# EAGLE board GPIO (EAGLE 7.1.0)
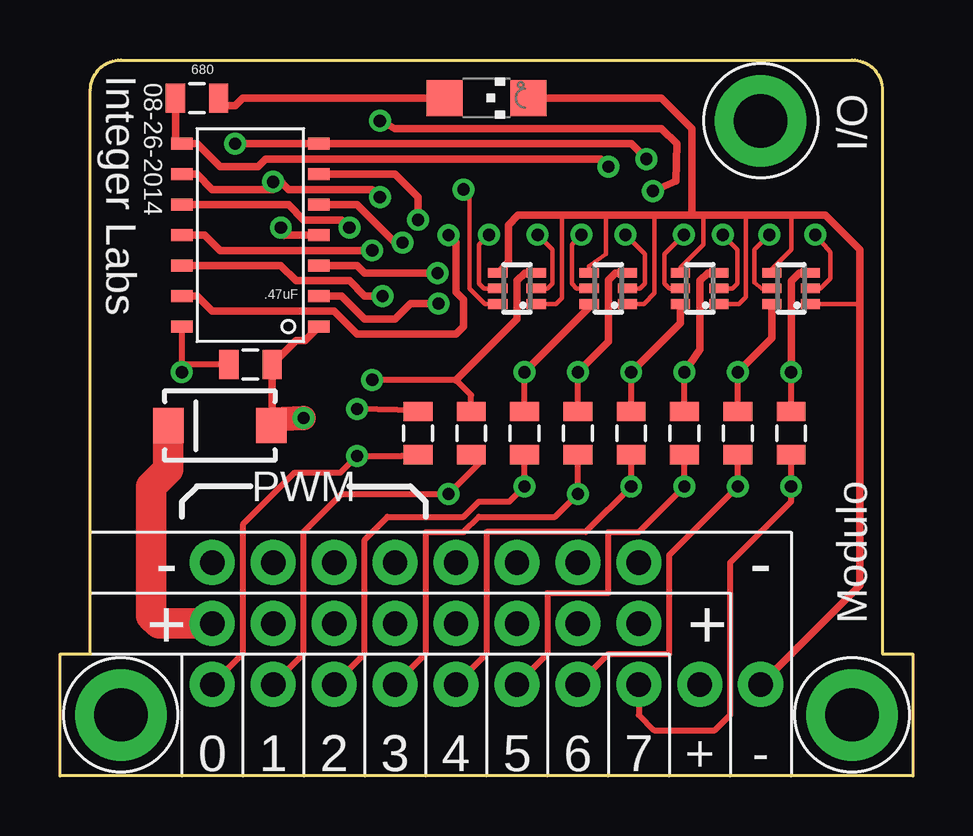
[diagram p0: board, top side]
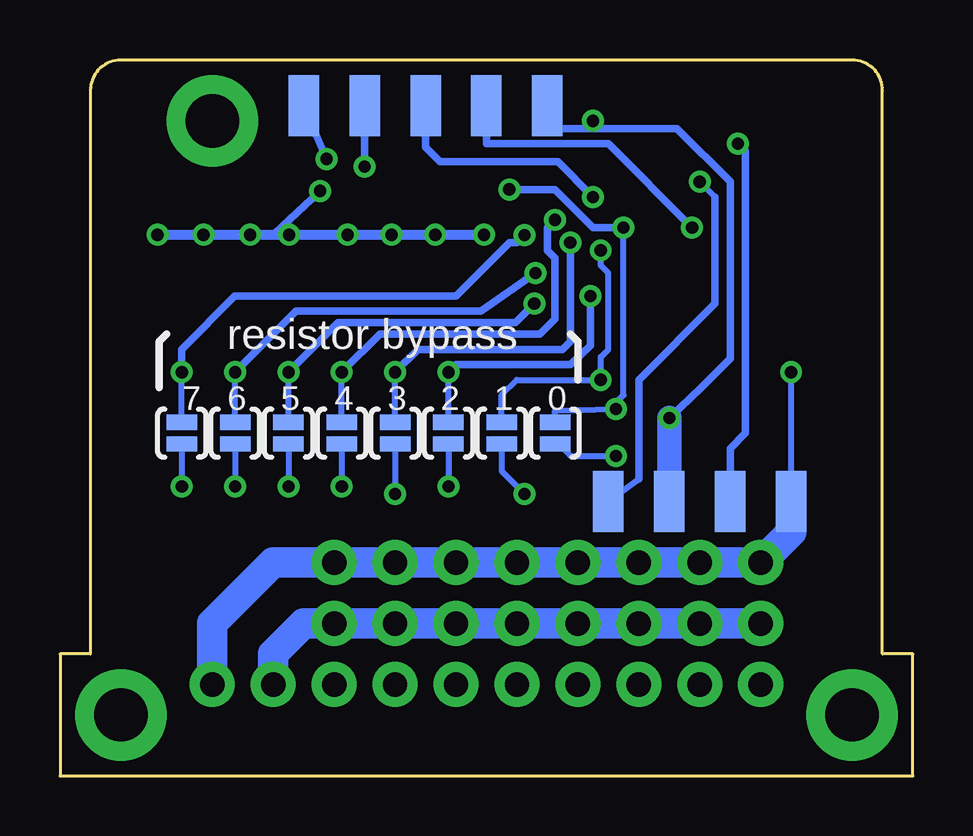
[diagram p1: board, bottom side, seen from below]

Size 35.56 x 29.84 mm. Coordinates in mm from the lower left corner, seen from the top.
Copper layers (1*16): Top 0.0178mm / dielectric 59mil / Bottom 0.0178mm
Design rules "SSC-EAGLE-2Lyr_v1.0.0.3 *": minimum track width 6mil, minimum drill 14mil, track to track 6mil, track to pad 6mil, pad to pad 6mil, via to via 6mil, smd to smd 6mil, copper to edge 20mil, drill to drill 16mil, minimum pad ring 8mil, minimum via ring 8mil, stop-mask expansion 3mil, vias tented up to drill 25mil, thermal gap 10mil

## Footprints (pad centres in the part's own frame; a part is rotated, then mirrored left to right if it is on the bottom)
0805 = smd 0.8 x 1.2: 1 -0.9,0; 2 0.9,0
SMA-DIODE = smd 1.27 x 1.47: A -2.15,0; C 2.15,0
SOT363_PHILIPS = smd 0.4 x 0.8: 1 -0.65,-0.8; 2 0,-0.8; 3 0.65,-0.8; 4 0.65,0.8; 5 0,0.8; 6 -0.65,0.8
1X08_NO_SILK = drill 1.016 pad 1.88: 1 0,0; 2 2.54,0; 3 5.08,0; 4 7.62,0; 5 10.16,0; 6 12.7,0; 7 15.24,0; 8 17.78,0
1X10_NO_SILK = drill 1.016 pad 1.88: 1 0,0; 2 2.54,0; 3 5.08,0; 4 7.62,0; 5 10.16,0; 6 12.7,0; 7 15.24,0; 8 17.78,0; 9 20.32,0; 10 22.86,0
CHIPLED_1206 = smd 1.5 x 1.5: A 0,-1.75; C 0,1.75
SJ_2S-NO = smd 0.635 x 1.27: 1 -0.45,0; 2 0.45,0
SOIC14 = smd 0.508 x 0.889: 1 0,-3.175; 2 1.27,-3.175; 3 2.54,-3.175; 4 3.81,-3.175; 5 5.08,-3.175; 6 6.35,-3.175; 7 7.62,-3.175; 8 7.62,2.54; 9 6.35,2.54; 10 5.08,2.54; 11 3.81,2.54; 12 2.54,2.54; 13 1.27,2.54; 14 0,2.54
FOOTPRINT2 = smd 1.27 x 2.54 bottom: BUS0 5.08,11.43; BUS1 7.62,11.43; BUS2 10.16,11.43; BUS3 12.7,11.43; PROG0 15.24,27.94; PROG1 17.78,27.94; PROG2 20.32,27.94; PROG3 22.86,27.94; PROG4 25.4,27.94 | drill 2.223 pad 3.81: P$1 2.54,2.54; P$2 33.02,2.54; P$3 29.21,27.305

## Placement (x,y rotation side)
C2  .47uF  [0805]  7.94,17.14 0 top
D1  DIODE-SCHOTTKY_  [SMA-DIODE]  6.67,14.61 180 top
D26  BAS70XY  [SOT363_PHILIPS]  19.05,20.32 90 top
D27  BAS70XY  [SOT363_PHILIPS]  22.86,20.32 90 top
D28  BAS70XY  [SOT363_PHILIPS]  26.67,20.32 90 top
D29  BAS70XY  [SOT363_PHILIPS]  30.48,20.32 90 top
JP1  [1X08_NO_SILK]  6.35,8.89 0 top
JP2  M10NO_SILK  [1X10_NO_SILK]  6.35,3.81 0 top
JP3  [1X08_NO_SILK]  6.35,6.35 0 top
LED  blue  [CHIPLED_1206]  17.78,28.26 270 top
R0  SOLDERJUMPERNO  [SJ_2S-NO]  23.81,14.29 270 bottom
R1  SOLDERJUMPERNO  [SJ_2S-NO]  21.59,14.29 270 bottom
R2  SOLDERJUMPERNO  [SJ_2S-NO]  14.92,14.29 270 bottom
R3  SOLDERJUMPERNO  [SJ_2S-NO]  17.14,14.29 270 bottom
R4  SOLDERJUMPERNO  [SJ_2S-NO]  28.26,14.29 270 bottom
R5  SOLDERJUMPERNO  [SJ_2S-NO]  19.37,14.29 270 bottom
R6  SOLDERJUMPERNO  [SJ_2S-NO]  26.04,14.29 270 bottom
R7  SOLDERJUMPERNO  [SJ_2S-NO]  30.48,14.29 270 bottom
R8  200  [0805]  30.48,14.29 90 top
R9  200  [0805]  28.26,14.29 90 top
R10  200  [0805]  26.04,14.29 90 top
R11  200  [0805]  23.81,14.29 90 top
R12  200  [0805]  21.59,14.29 90 top
R13  200  [0805]  19.37,14.29 90 top
R14  200  [0805]  17.14,14.29 90 top
R15  200  [0805]  14.92,14.29 90 top
RLED  680  [0805]  5.71,28.26 180 top
U$3  TINY841  [SOIC14]  7.62,18.73 90 top
U$4  FOOTPRINTFOOTPRINT-2  [FOOTPRINT2]  0,0 0 top

## Library data of the parts
C2 = SparkFun-Capacitors
D1 = SparkFun-DiscreteSemi
D26-D29 = diode
JP1-JP3 = SparkFun-Connectors
LED = led
R0 R1-R7 RLED = SparkFun-Passives
R8-R15 = SparkFun-Resistors
U$3 U$4 = IntegerLabs

## Nets
GND: C2.1 D26.1 D26.4 D27.1 D27.4 D28.1 D28.4 D29.1 D29.4 JP1.1 JP1.2 JP1.3 JP1.4 JP1.5 JP1.6 JP1.7 JP1.8 JP2.10 LED.C U$3.14 U$4.BUS0
GPIO0: D26.6 R2.1 R15.2 U$3.10
GPIO1: D26.3 R3.1 R14.2 U$3.11
GPIO2: D27.6 R5.1 R13.2 U$3.12
GPIO3: D27.3 R1.1 R12.2 U$3.5
GPIO4: D28.6 R0.1 R11.2 U$3.6
GPIO5: D28.3 R6.1 R10.2 U$3.2
GPIO6: D29.6 R4.1 R9.2 U$3.3
GPIO7: D29.3 R7.1 R8.2 U$3.13
MISO/LED: RLED.2 U$3.8 U$4.PROG3
N$5: LED.A RLED.1
P0: JP2.1 R2.2 R15.1
P1: JP2.2 R3.2 R14.1
P2: JP2.3 R5.2 R13.1
P3: JP2.4 R1.2 R12.1
P4: JP2.5 R0.2 R11.1
P5: JP2.6 R6.2 R10.1
P6: JP2.7 R4.2 R9.1
P7: JP2.8 R7.2 R8.1
RESET: U$3.4 U$4.PROG1
SCL/SCK: U$3.9 U$4.BUS3 U$4.PROG2
SDA/MOSI: U$3.7 U$4.BUS1 U$4.PROG4
VCC: C2.2 D1.A D26.2 D26.5 D27.2 D27.5 D28.2 D28.5 D29.2 D29.5 U$3.1 U$4.BUS2 U$4.PROG0
VOUT: D1.C JP2.9 JP3.1 JP3.2 JP3.3 JP3.4 JP3.5 JP3.6 JP3.7 JP3.8

## Tracks (layer width: path | path; a pad name or v marks a point on that pad's centre or on a via)
GND  (via drill 0.51)
  Top 0.191: D26.1 20.69,19.67 20.93,19.91 20.93,23.37 | D27.1 24.34,19.67 24.79,20.12 24.79,23.37 | D28.4 25.87,21.2 26.82,22.15 26.82,23.37 | D28.1 28.31,19.67 28.6,19.96 28.6,23.37 | D29.4 29.68,20.92 29.67,21.13 30.48,21.95 30.48,23.37 | D27.4 22.06,21.25 22.76,21.74 22.76,23.37 | D26.4 18.25,21.09 | D29.1 33.3,19.67 33.34,19.71
  Top 0.254: 7.04,16.77 C2.1 5.08,17.14 | U$3.14 5.08,17.14 | 5.08,17.14 v5.08,16.83
  Top 0.318: 26.35,23.37 26.82,23.37 28.6,23.37 30.48,23.37 31.9,23.37 33.34,21.93 33.34,19.71 33.34,7.94 JP2.10 | 26.35,23.37 24.79,23.37 22.76,23.37 20.93,23.37 19.1,23.37 18.69,22.96 18.69,21.41 D26.4 | LED.C 25.08,28.26 26.35,26.99 26.35,23.37
  Bottom 0.254: U$4.BUS0 v5.08,16.83
  Bottom 1.27: U$4.BUS0 5.08,10.16 JP1.1 JP1.2 JP1.3 JP1.4 JP1.5 JP1.6 JP1.7 JP1.8 26.67,8.89 29.21,6.35 JP2.10
GPIO0  (via drill 0.51)
  Top 0.191: D26.6 17.72,19.67 17.07,20.32 17.07,22.99 17.07,24.21 v16.83,24.45
  Top 0.254: R15.2 14.92,15.24 v12.38,15.29
  Top 0.318: U$3.10 9.53,23.81 10.16,23.18 11.75,23.18 v12.06,22.86
  Bottom 0.254: v12.06,22.86 12.06,15.88 12.38,15.56 v12.38,15.29 14.92,15.24 R2.1
  Bottom 0.318: v12.06,22.86 13.34,22.86 14.92,24.45 v16.83,24.45
GPIO1  (via drill 0.51)
  Top 0.254: R14.2 17.14,15.88 16.51,16.51 v13.02,16.51
  Top 0.318: U$3.11 6.03,22.54 6.67,21.91 v13.02,21.91 | D26.3 19.38,20.97 19.05,20.64 19.05,19.05 16.51,16.51
  Bottom 0.254: v13.02,21.91 13.02,21.27 12.7,20.95 12.7,17.78 13.02,17.46 v13.02,16.51 16.51,16.51 17.14,15.88 R3.1
GPIO2  (via drill 0.51)
  Top 0.254: R13.2 v19.37,16.83
  Top 0.318: U$3.12 9.21,21.27 9.84,20.64 12.06,20.64 12.7,20 v13.45,20 | 19.22,16.98 v19.37,16.83 22.06,19.52 D27.6
  Bottom 0.254: R5.1 v19.37,16.83
  Bottom 0.318: v19.37,16.83 19.05,17.14 14.29,17.14 13.45,17.93 v13.45,20
GPIO3  (via drill 0.51)
  Top 0.254: R12.2 v21.59,16.83
  Top 0.318: v14.29,22.23 13.97,22.23 12.38,23.81 U$3.5 | D27.3 23.15,20.97 22.86,20.68 22.86,18.1 v21.59,16.83
  Bottom 0.254: R1.1 v21.59,16.83
  Bottom 0.318: v21.59,16.83 20.64,17.78 14.61,17.78 14.29,18.1 v14.29,22.23
GPIO4  (via drill 0.51)
  Top 0.254: R11.2 v23.81,16.83
  Top 0.318: D28.6 25.87,18.89 v23.81,16.83 | U$3.6 13.97,25.08 14.92,24.13 v14.92,23.18
  Bottom 0.254: R0.1 v23.81,16.83
  Bottom 0.318: v23.81,16.83 22.23,18.41 15.56,18.41 14.92,19.05 14.92,21.59 15.24,21.91 15.24,22.86 v14.92,23.18
GPIO5  (via drill 0.51)
  Top 0.254: R10.2 v26.04,16.83
  Top 0.318: v15.79,19.68 14.61,19.68 13.97,19.05 12.7,19.05 11.75,20 U$3.2 | D28.3 27,20.97 26.67,20.64 26.67,17.78 v26.04,16.83
  Bottom 0.254: R6.1 v26.04,16.83
  Bottom 0.318: v26.04,16.83 23.97,18.89 16.58,18.89 v15.79,19.68
GPIO6  (via drill 0.51)
  Top 0.254: R9.2 v28.26,16.83
  Top 0.318: U$3.3 12.38,21.27 12.7,20.95 v15.73,20.95 | D29.6 29.68,18.25 v28.26,16.83
  Bottom 0.254: R4.1 v28.26,16.83
  Bottom 0.318: v28.26,16.83 25.72,19.37 18.01,19.37 v15.73,20.95
GPIO7  (via drill 0.51)
  Top 0.254: R8.2 v30.48,16.83
  Top 0.318: U$3.13 5.71,20 6.35,19.37 11.43,19.37 12.38,18.41 16.51,18.41 16.83,18.73 16.83,19.85 16.51,20.17 16.51,22.23 v16.19,22.54 | 30.48,17.14 v30.48,16.83 30.48,20.62 30.82,20.97 D29.3
  Bottom 0.254: R7.1 v30.48,16.83
  Bottom 0.318: v30.48,16.83 30.48,17.78 30.49,17.78 28.27,20 19.05,20 16.83,22.23 16.51,22.23 v16.19,22.54
MISO/LED  (via drill 0.51)
  Top 0.254: 4.82,26.62 U$3.8
  Top 0.318: U$3.8 5.71,26.35 6.67,25.4 8.26,25.4 8.57,25.72 22.54,25.72 v22.86,25.4 | RLED.2 4.82,26.62
  Bottom 0.318: U$4.PROG3 v22.86,25.4
N$5
  Top 0.254: 6.93,27.94 RLED.1
  Top 0.318: LED.A 7.62,28.26 7.3,27.94 6.93,27.94
P0  (via drill 0.51)
  Top 0.254: JP2.1 7.62,5.08 7.62,10.48 9.78,12.64 11.69,12.64 v12.38,13.34 14.24,13.34 R15.1
  Bottom 0.254: v12.38,13.34 14.29,13.34 14.79,13.84 R2.2
P1  (via drill 0.51)
  Top 0.254: JP2.2 10.16,5.08 10.16,10.16 11.75,11.75 v16.19,11.75 17.46,13.02 R14.1
  Bottom 0.254: R3.2 17.14,12.7 v16.19,11.75
P2  (via drill 0.51)
  Top 0.254: JP2.3 12.7,5.08 12.7,9.84 13.65,10.79 16.83,10.79 17.46,11.43 18.73,11.43 v19.37,12.06 R13.1
  Bottom 0.254: R5.2 v19.37,12.06
P3  (via drill 0.51)
  Top 0.254: JP2.4 15.24,5.08 15.24,10.16 16.83,10.16 17.46,10.79 20.64,10.79 v21.59,11.75 R12.1
  Bottom 0.254: R1.2 v21.59,11.75
P4  (via drill 0.51)
  Top 0.254: JP2.5 17.78,5.08 17.78,10.16 21.91,10.16 v23.81,12.06 R11.1
  Bottom 0.254: R0.2 v23.81,12.06
P5  (via drill 0.51)
  Top 0.254: JP2.6 20.32,5.08 20.32,7.62 22.86,7.62 22.86,10.16 24.13,10.16 v26.04,12.06 R10.1
  Bottom 0.254: R6.2 v26.04,12.06
P6  (via drill 0.51)
  Top 0.254: JP2.7 22.86,5.08 25.4,5.08 25.4,9.21 v28.26,12.06 R9.1
  Bottom 0.254: R4.2 v28.26,12.06
P7  (via drill 0.51)
  Top 0.254: JP2.8 24.13,2.54 24.77,1.91 27.3,1.91 27.94,2.54 27.94,8.89 30.48,11.43 v30.48,12.06 R8.1
  Bottom 0.254: 30.48,13.34 R7.2 v30.48,12.06
RESET  (via drill 0.51)
  Top 0.318: U$3.4 9.21,22.54 v9.21,22.86
  Bottom 0.318: v9.21,22.86 12.7,26.35 17.78,26.35 U$4.PROG1
SCL/SCK  (via drill 0.51)
  Top 0.318: U$3.9 5.71,25.08 6.35,24.45 8.89,24.45 v8.89,24.77 9.21,24.77 9.53,24.45 13.02,24.45 v13.34,24.13
  Bottom 0.254: U$4.BUS3 11.43,12.38 | 8.26,24.13 v8.89,24.77
  Bottom 0.318: 11.43,12.38 11.43,16.51 8.26,19.68 8.26,24.13 | U$4.PROG2 20.32,26.21 19.71,25.6 14.81,25.6 v13.34,24.13
SDA/MOSI  (via drill 0.51)
  Top 0.318: v7.3,26.35 U$3.7 23.81,26.35 v24.45,25.72
  Bottom 0.318: U$4.BUS1 7.62,13.65 6.99,14.29 6.99,26.04 v7.3,26.35 | U$4.PROG4 v24.45,25.72
VCC  (via drill 0.51)
  Top 0.191: D27.5 21.54,20.32 21.34,20.52 21.34,22.15 v21.74,22.55 | D26.2 20.32,20.32 20.52,20.52 20.52,21.95 v19.91,22.55 | D26.5 17.68,20.32 17.48,20.52 17.48,22.15 v17.88,22.55 | D27.2 24.18,20.32 24.38,20.52 24.38,21.74 v23.57,22.55 | D28.5 25.4,20.32 25.2,20.52 25.2,21.74 v26.01,22.55 | D28.2 28.04,20.32 28.25,20.52 28.25,21.95 v27.64,22.55 | D29.5 29.26,20.32 28.96,20.57 28.96,21.93 v29.58,22.55 | D29.2 31.7,20.32 32.11,20.73 32.11,21.84 v31.5,22.55
  Top 0.254: 8.84,16.77 C2.2 8.82,17.12
  Top 0.318: U$3.1 10.21,18.15 9.84,18.15 C2.2 | 8.82,14.85 D1.A 8.84,14.62 8.84,16.77 | v24.71,24.38 25.67,24.8 25.72,26.35 25.08,26.99 13.97,26.99 v13.34,27.3
  Top 1.016: 8.82,14.85 v10.16,14.92
  Bottom 0.318: v10.16,14.92 8.82,16.19 7.62,17.39 7.62,24.77 9.84,26.99 13.34,26.99 | U$4.PROG0 15.24,26.99 13.34,26.99 | v24.71,24.38 26.62,22.61 26.67,22.55 | 13.34,26.99 v13.34,27.3
  Bottom 0.406: v31.5,22.55 v29.58,22.55 v27.64,22.55 26.67,22.55 v26.01,22.55 v23.57,22.55 v21.74,22.55 v19.91,22.55 v17.88,22.55
  Bottom 1.016: U$4.BUS2 v10.16,14.92
VOUT
  Top 1.27: D1.C 4.52,12.77 3.81,12.06 3.81,6.67 4.13,6.35 JP3.1
  Bottom 1.27: JP3.1 JP3.2 JP3.3 JP3.4 JP3.5 JP3.6 JP3.7 JP3.8 25.4,6.35 26.67,5.08 JP2.9

## Text on the board
tPlace: Integer Labs | 08-26-2014 | I/O | PWM | - | - | + | + | Modulo | 0 | 1 | 2 | 3 | 4 | 5 | 6 | 7 | + | -
bPlace: resistor bypass | 0 | 1 | 2 | 3 | 4 | 5 | 6 | 7